# EAGLE board SparkFun-LSM9DS1-Breakout-Panel-v10 (EAGLE 6.6.0), part 1 of 8
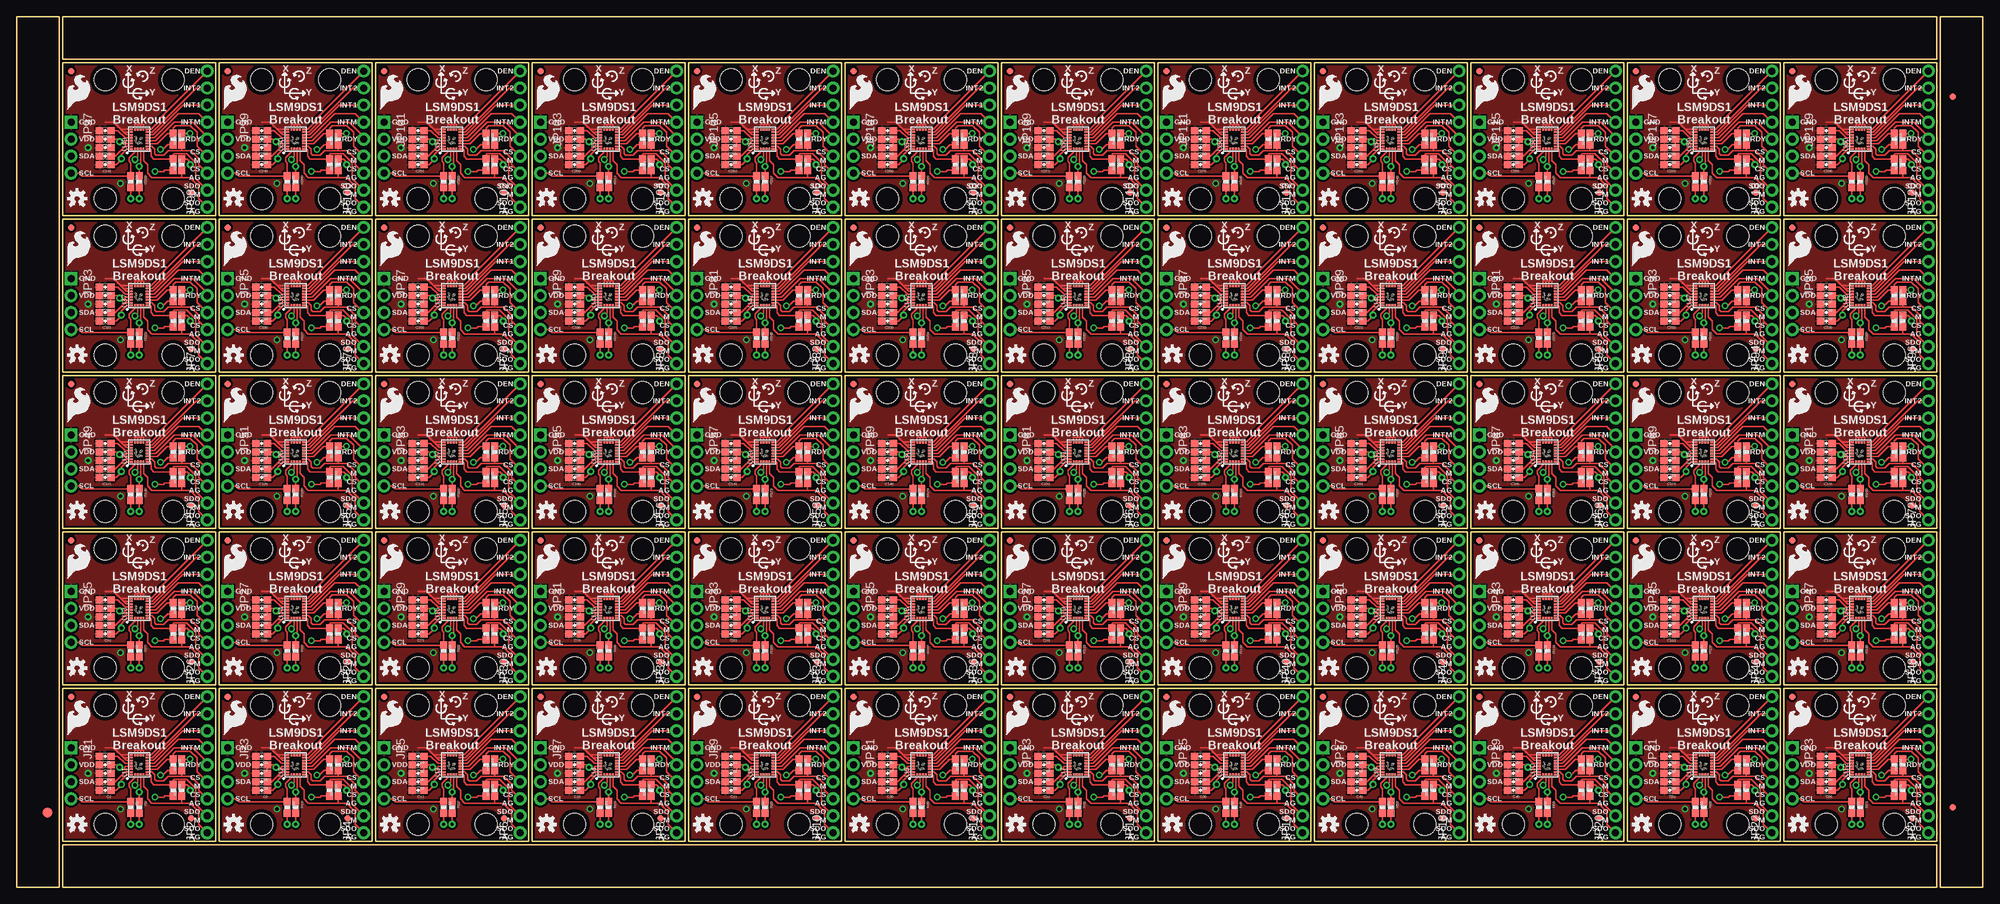
[diagram p0: board, top side]
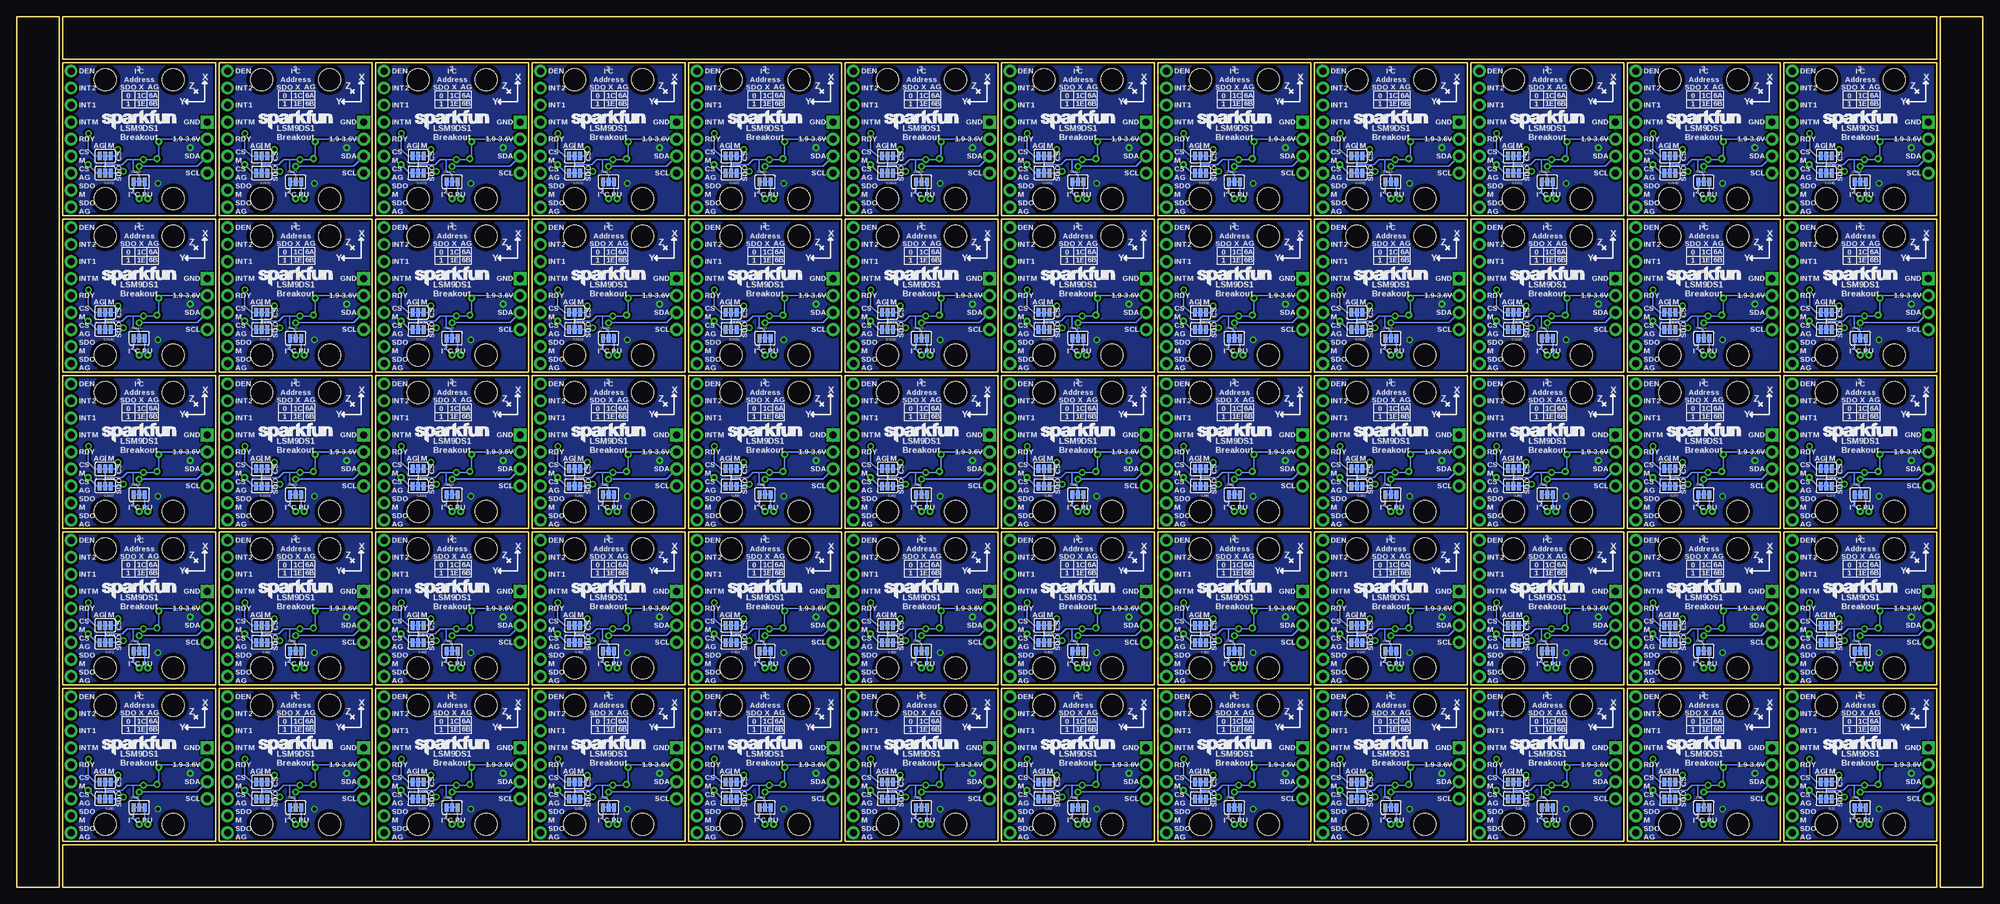
[diagram p1: board, bottom side, seen from below]

Size 293.62 x 130.05 mm. Coordinates in mm from the lower left corner, seen from the top.
Outline: 256 segments
Copper layers (1*16): Top 0.035mm / dielectric 1.5mm / Bottom 0.035mm
Design rules "SparkFun-2-layer *": minimum track width 7mil, minimum drill 15mil, track to track 6mil, track to pad 6mil, pad to pad 6mil, via to via 6mil, smd to smd 6mil, copper to edge 8mil, drill to drill 8mil, minimum pad ring 12mil, minimum via ring 10mil, stop-mask expansion 4mil, vias tented up to drill 20mil, thermal gap 10mil

## Footprints (pad centres in the part's own frame; a part is rotated, then mirrored left to right if it is on the bottom)
0603-CAP = smd 1.1 x 1: 1 -0.85,0; 2 0.85,0
FIDUCIAL-1.5X3 = smd 1.5 x 1.5: 1 0,0
FIDUCIAL-1X2 = smd 1 x 1: 1 0,0
1X04_NO_SILK = drill 1.016 pad 1.88 square: 1 0,0 | drill 1.016 pad 1.88: 2 2.54,0; 3 5.08,0; 4 7.62,0
1X09_NO_SILK = drill 1.016 pad 1.88: 1 0,0; 2 2.54,0; 3 5.08,0; 4 7.62,0; 5 10.16,0; 6 12.7,0; 7 15.24,0; 8 17.78,0; 9 20.32,0
0603-RES = smd 1.1 x 1: 1 -0.85,0; 2 0.85,0
PAD-JUMPER-3-3OF3_NC_BY_TRACE_YES_SILK_FULL_BOX = smd 0.635 x 1.27: 1 -0.813,0; 2 0,0; 3 0.813,0
STAND-OFF = hole 3.302: 0,0
LGA24-8X4 = smd 0.27 x 0.45: 1 -1.505,1.225; 6 -1.505,-1.225; 7 -1.075,-1.225; 8 -0.645,-1.225; 9 -0.215,-1.225; 10 0.215,-1.225; 11 0.645,-1.225; 12 1.075,-1.225; 13 1.505,-1.225; 18 1.505,1.225; 19 1.075,1.225; 20 0.645,1.225; 21 0.215,1.225; 22 -0.215,1.225; 23 -0.645,1.225; 24 -1.075,1.225 | smd 0.45 x 0.27: 2 -1.475,0.645; 3 -1.475,0.215; 4 -1.475,-0.215; 5 -1.475,-0.645; 14 1.475,-0.645; 15 1.475,-0.215; 16 1.475,0.215; 17 1.475,0.645

## Placement (x,y rotation side)
C1  0.1uF  [0603-CAP]  13.21,15.75 180 top
C2  0.1uF  [0603-CAP]  13.21,14.48 180 top
C3  0.1uF  [0603-CAP]  13.21,18.29 180 top
C4  10uF  [0603-CAP]  13.21,17.02 180 top
C5  10nF  [0603-CAP]  13.21,19.56 180 top
C6  0.1uF  [0603-CAP]  36.58,14.48 180 top
C7  0.1uF  [0603-CAP]  36.58,18.29 180 top
C8  0.1uF  [0603-CAP]  36.58,15.75 180 top
C9  10nF  [0603-CAP]  36.58,19.56 180 top
C10  10uF  [0603-CAP]  36.58,17.02 180 top
C11  0.1uF  [0603-CAP]  59.94,14.48 180 top
C12  0.1uF  [0603-CAP]  59.94,18.29 180 top
C13  0.1uF  [0603-CAP]  59.94,15.75 180 top
C14  10nF  [0603-CAP]  59.94,19.56 180 top
C15  10uF  [0603-CAP]  59.94,17.02 180 top
C16  0.1uF  [0603-CAP]  83.31,14.48 180 top
C17  0.1uF  [0603-CAP]  83.31,18.29 180 top
C18  0.1uF  [0603-CAP]  83.31,15.75 180 top
C19  10nF  [0603-CAP]  83.31,19.56 180 top
C20  10uF  [0603-CAP]  83.31,17.02 180 top
C21  0.1uF  [0603-CAP]  106.68,14.48 180 top
C22  0.1uF  [0603-CAP]  106.68,18.29 180 top
C23  0.1uF  [0603-CAP]  106.68,15.75 180 top
C24  10nF  [0603-CAP]  106.68,19.56 180 top
C25  10uF  [0603-CAP]  106.68,17.02 180 top
C26  0.1uF  [0603-CAP]  130.05,14.48 180 top
C27  0.1uF  [0603-CAP]  130.05,18.29 180 top
C28  0.1uF  [0603-CAP]  130.05,15.75 180 top
C29  10nF  [0603-CAP]  130.05,19.56 180 top
C30  10uF  [0603-CAP]  130.05,17.02 180 top
C31  0.1uF  [0603-CAP]  153.42,14.48 180 top
C32  0.1uF  [0603-CAP]  153.42,18.29 180 top
C33  0.1uF  [0603-CAP]  153.42,15.75 180 top
C34  10nF  [0603-CAP]  153.42,19.56 180 top
C35  10uF  [0603-CAP]  153.42,17.02 180 top
C36  0.1uF  [0603-CAP]  176.78,14.48 180 top
C37  0.1uF  [0603-CAP]  176.78,18.29 180 top
C38  0.1uF  [0603-CAP]  176.78,15.75 180 top
C39  10nF  [0603-CAP]  176.78,19.56 180 top
C40  10uF  [0603-CAP]  176.78,17.02 180 top
C41  0.1uF  [0603-CAP]  200.15,14.48 180 top
C42  0.1uF  [0603-CAP]  200.15,18.29 180 top
C43  0.1uF  [0603-CAP]  200.15,15.75 180 top
C44  10nF  [0603-CAP]  200.15,19.56 180 top
C45  10uF  [0603-CAP]  200.15,17.02 180 top
C46  0.1uF  [0603-CAP]  223.52,14.48 180 top
C47  0.1uF  [0603-CAP]  223.52,18.29 180 top
C48  0.1uF  [0603-CAP]  223.52,15.75 180 top
C49  10nF  [0603-CAP]  223.52,19.56 180 top
C50  10uF  [0603-CAP]  223.52,17.02 180 top
C51  0.1uF  [0603-CAP]  246.89,14.48 180 top
C52  0.1uF  [0603-CAP]  246.89,18.29 180 top
C53  0.1uF  [0603-CAP]  246.89,15.75 180 top
C54  10nF  [0603-CAP]  246.89,19.56 180 top
C55  10uF  [0603-CAP]  246.89,17.02 180 top
C56  0.1uF  [0603-CAP]  270.26,14.48 180 top
C57  0.1uF  [0603-CAP]  270.26,18.29 180 top
C58  0.1uF  [0603-CAP]  270.26,15.75 180 top
C59  10nF  [0603-CAP]  270.26,19.56 180 top
C60  10uF  [0603-CAP]  270.26,17.02 180 top
C61  0.1uF  [0603-CAP]  13.21,37.85 180 top
C62  0.1uF  [0603-CAP]  13.21,41.66 180 top
C63  0.1uF  [0603-CAP]  13.21,39.12 180 top
C64  10nF  [0603-CAP]  13.21,42.93 180 top
C65  10uF  [0603-CAP]  13.21,40.39 180 top
C66  0.1uF  [0603-CAP]  36.58,37.85 180 top
C67  0.1uF  [0603-CAP]  36.58,41.66 180 top
C68  0.1uF  [0603-CAP]  36.58,39.12 180 top
C69  10nF  [0603-CAP]  36.58,42.93 180 top
C70  10uF  [0603-CAP]  36.58,40.39 180 top
C71  0.1uF  [0603-CAP]  59.94,37.85 180 top
C72  0.1uF  [0603-CAP]  59.94,41.66 180 top
C73  0.1uF  [0603-CAP]  59.94,39.12 180 top
C74  10nF  [0603-CAP]  59.94,42.93 180 top
C75  10uF  [0603-CAP]  59.94,40.39 180 top
C76  0.1uF  [0603-CAP]  83.31,37.85 180 top
C77  0.1uF  [0603-CAP]  83.31,41.66 180 top
C78  0.1uF  [0603-CAP]  83.31,39.12 180 top
C79  10nF  [0603-CAP]  83.31,42.93 180 top
C80  10uF  [0603-CAP]  83.31,40.39 180 top
C81  0.1uF  [0603-CAP]  106.68,37.85 180 top
C82  0.1uF  [0603-CAP]  106.68,41.66 180 top
C83  0.1uF  [0603-CAP]  106.68,39.12 180 top
C84  10nF  [0603-CAP]  106.68,42.93 180 top
C85  10uF  [0603-CAP]  106.68,40.39 180 top
C86  0.1uF  [0603-CAP]  130.05,37.85 180 top
C87  0.1uF  [0603-CAP]  130.05,41.66 180 top
C88  0.1uF  [0603-CAP]  130.05,39.12 180 top
C89  10nF  [0603-CAP]  130.05,42.93 180 top
C90  10uF  [0603-CAP]  130.05,40.39 180 top
C91  0.1uF  [0603-CAP]  153.42,37.85 180 top
C92  0.1uF  [0603-CAP]  153.42,41.66 180 top
C93  0.1uF  [0603-CAP]  153.42,39.12 180 top
C94  10nF  [0603-CAP]  153.42,42.93 180 top
C95  10uF  [0603-CAP]  153.42,40.39 180 top
C96  0.1uF  [0603-CAP]  176.78,37.85 180 top
C97  0.1uF  [0603-CAP]  176.78,41.66 180 top
C98  0.1uF  [0603-CAP]  176.78,39.12 180 top
C99  10nF  [0603-CAP]  176.78,42.93 180 top
C100  10uF  [0603-CAP]  176.78,40.39 180 top
C101  0.1uF  [0603-CAP]  200.15,37.85 180 top
C102  0.1uF  [0603-CAP]  200.15,41.66 180 top
C103  0.1uF  [0603-CAP]  200.15,39.12 180 top
C104  10nF  [0603-CAP]  200.15,42.93 180 top
C105  10uF  [0603-CAP]  200.15,40.39 180 top
C106  0.1uF  [0603-CAP]  223.52,37.85 180 top
C107  0.1uF  [0603-CAP]  223.52,41.66 180 top
C108  0.1uF  [0603-CAP]  223.52,39.12 180 top
C109  10nF  [0603-CAP]  223.52,42.93 180 top
C110  10uF  [0603-CAP]  223.52,40.39 180 top
C111  0.1uF  [0603-CAP]  246.89,37.85 180 top
C112  0.1uF  [0603-CAP]  246.89,41.66 180 top
C113  0.1uF  [0603-CAP]  246.89,39.12 180 top
C114  10nF  [0603-CAP]  246.89,42.93 180 top
C115  10uF  [0603-CAP]  246.89,40.39 180 top
C116  0.1uF  [0603-CAP]  270.26,37.85 180 top
C117  0.1uF  [0603-CAP]  270.26,41.66 180 top
C118  0.1uF  [0603-CAP]  270.26,39.12 180 top
C119  10nF  [0603-CAP]  270.26,42.93 180 top
C120  10uF  [0603-CAP]  270.26,40.39 180 top
C121  0.1uF  [0603-CAP]  13.21,61.21 180 top
C122  0.1uF  [0603-CAP]  13.21,65.02 180 top
C123  0.1uF  [0603-CAP]  13.21,62.48 180 top
C124  10nF  [0603-CAP]  13.21,66.29 180 top
C125  10uF  [0603-CAP]  13.21,63.75 180 top
C126  0.1uF  [0603-CAP]  36.58,61.21 180 top
C127  0.1uF  [0603-CAP]  36.58,65.02 180 top
C128  0.1uF  [0603-CAP]  36.58,62.48 180 top
C129  10nF  [0603-CAP]  36.58,66.29 180 top
C130  10uF  [0603-CAP]  36.58,63.75 180 top
C131  0.1uF  [0603-CAP]  59.94,61.21 180 top
C132  0.1uF  [0603-CAP]  59.94,65.02 180 top
C133  0.1uF  [0603-CAP]  59.94,62.48 180 top
C134  10nF  [0603-CAP]  59.94,66.29 180 top
C135  10uF  [0603-CAP]  59.94,63.75 180 top
C136  0.1uF  [0603-CAP]  83.31,61.21 180 top
C137  0.1uF  [0603-CAP]  83.31,65.02 180 top
C138  0.1uF  [0603-CAP]  83.31,62.48 180 top
C139  10nF  [0603-CAP]  83.31,66.29 180 top
C140  10uF  [0603-CAP]  83.31,63.75 180 top
C141  0.1uF  [0603-CAP]  106.68,61.21 180 top
C142  0.1uF  [0603-CAP]  106.68,65.02 180 top
C143  0.1uF  [0603-CAP]  106.68,62.48 180 top
C144  10nF  [0603-CAP]  106.68,66.29 180 top
C145  10uF  [0603-CAP]  106.68,63.75 180 top
C146  0.1uF  [0603-CAP]  130.05,61.21 180 top
C147  0.1uF  [0603-CAP]  130.05,65.02 180 top
C148  0.1uF  [0603-CAP]  130.05,62.48 180 top
C149  10nF  [0603-CAP]  130.05,66.29 180 top
C150  10uF  [0603-CAP]  130.05,63.75 180 top
C151  0.1uF  [0603-CAP]  153.42,61.21 180 top
C152  0.1uF  [0603-CAP]  153.42,65.02 180 top
C153  0.1uF  [0603-CAP]  153.42,62.48 180 top
C154  10nF  [0603-CAP]  153.42,66.29 180 top
C155  10uF  [0603-CAP]  153.42,63.75 180 top
C156  0.1uF  [0603-CAP]  176.78,61.21 180 top
C157  0.1uF  [0603-CAP]  176.78,65.02 180 top
C158  0.1uF  [0603-CAP]  176.78,62.48 180 top
C159  10nF  [0603-CAP]  176.78,66.29 180 top
C160  10uF  [0603-CAP]  176.78,63.75 180 top
C161  0.1uF  [0603-CAP]  200.15,61.21 180 top
C162  0.1uF  [0603-CAP]  200.15,65.02 180 top
C163  0.1uF  [0603-CAP]  200.15,62.48 180 top
C164  10nF  [0603-CAP]  200.15,66.29 180 top
C165  10uF  [0603-CAP]  200.15,63.75 180 top
C166  0.1uF  [0603-CAP]  223.52,61.21 180 top
C167  0.1uF  [0603-CAP]  223.52,65.02 180 top
C168  0.1uF  [0603-CAP]  223.52,62.48 180 top
C169  10nF  [0603-CAP]  223.52,66.29 180 top
C170  10uF  [0603-CAP]  223.52,63.75 180 top
C171  0.1uF  [0603-CAP]  246.89,61.21 180 top
C172  0.1uF  [0603-CAP]  246.89,65.02 180 top
C173  0.1uF  [0603-CAP]  246.89,62.48 180 top
C174  10nF  [0603-CAP]  246.89,66.29 180 top
C175  10uF  [0603-CAP]  246.89,63.75 180 top
C176  0.1uF  [0603-CAP]  270.26,61.21 180 top
C177  0.1uF  [0603-CAP]  270.26,65.02 180 top
C178  0.1uF  [0603-CAP]  270.26,62.48 180 top
C179  10nF  [0603-CAP]  270.26,66.29 180 top
C180  10uF  [0603-CAP]  270.26,63.75 180 top
C181  0.1uF  [0603-CAP]  13.21,84.58 180 top
C182  0.1uF  [0603-CAP]  13.21,88.39 180 top
C183  0.1uF  [0603-CAP]  13.21,85.85 180 top
C184  10nF  [0603-CAP]  13.21,89.66 180 top
C185  10uF  [0603-CAP]  13.21,87.12 180 top
C186  0.1uF  [0603-CAP]  36.58,84.58 180 top
C187  0.1uF  [0603-CAP]  36.58,88.39 180 top
C188  0.1uF  [0603-CAP]  36.58,85.85 180 top
C189  10nF  [0603-CAP]  36.58,89.66 180 top
C190  10uF  [0603-CAP]  36.58,87.12 180 top
C191  0.1uF  [0603-CAP]  59.94,84.58 180 top
C192  0.1uF  [0603-CAP]  59.94,88.39 180 top
C193  0.1uF  [0603-CAP]  59.94,85.85 180 top
C194  10nF  [0603-CAP]  59.94,89.66 180 top
C195  10uF  [0603-CAP]  59.94,87.12 180 top
C196  0.1uF  [0603-CAP]  83.31,84.58 180 top
C197  0.1uF  [0603-CAP]  83.31,88.39 180 top
C198  0.1uF  [0603-CAP]  83.31,85.85 180 top
C199  10nF  [0603-CAP]  83.31,89.66 180 top
C200  10uF  [0603-CAP]  83.31,87.12 180 top
C201  0.1uF  [0603-CAP]  106.68,84.58 180 top
C202  0.1uF  [0603-CAP]  106.68,88.39 180 top
C203  0.1uF  [0603-CAP]  106.68,85.85 180 top
C204  10nF  [0603-CAP]  106.68,89.66 180 top
C205  10uF  [0603-CAP]  106.68,87.12 180 top
C206  0.1uF  [0603-CAP]  130.05,84.58 180 top
C207  0.1uF  [0603-CAP]  130.05,88.39 180 top
C208  0.1uF  [0603-CAP]  130.05,85.85 180 top
C209  10nF  [0603-CAP]  130.05,89.66 180 top
C210  10uF  [0603-CAP]  130.05,87.12 180 top
C211  0.1uF  [0603-CAP]  153.42,84.58 180 top
C212  0.1uF  [0603-CAP]  153.42,88.39 180 top
C213  0.1uF  [0603-CAP]  153.42,85.85 180 top
C214  10nF  [0603-CAP]  153.42,89.66 180 top
C215  10uF  [0603-CAP]  153.42,87.12 180 top
C216  0.1uF  [0603-CAP]  176.78,84.58 180 top
C217  0.1uF  [0603-CAP]  176.78,88.39 180 top
C218  0.1uF  [0603-CAP]  176.78,85.85 180 top
C219  10nF  [0603-CAP]  176.78,89.66 180 top
C220  10uF  [0603-CAP]  176.78,87.12 180 top
C221  0.1uF  [0603-CAP]  200.15,84.58 180 top
C222  0.1uF  [0603-CAP]  200.15,88.39 180 top
C223  0.1uF  [0603-CAP]  200.15,85.85 180 top
C224  10nF  [0603-CAP]  200.15,89.66 180 top
C225  10uF  [0603-CAP]  200.15,87.12 180 top
C226  0.1uF  [0603-CAP]  223.52,84.58 180 top
C227  0.1uF  [0603-CAP]  223.52,88.39 180 top
C228  0.1uF  [0603-CAP]  223.52,85.85 180 top
C229  10nF  [0603-CAP]  223.52,89.66 180 top
C230  10uF  [0603-CAP]  223.52,87.12 180 top
C231  0.1uF  [0603-CAP]  246.89,84.58 180 top
C232  0.1uF  [0603-CAP]  246.89,88.39 180 top
C233  0.1uF  [0603-CAP]  246.89,85.85 180 top
C234  10nF  [0603-CAP]  246.89,89.66 180 top
C235  10uF  [0603-CAP]  246.89,87.12 180 top
C236  0.1uF  [0603-CAP]  270.26,84.58 180 top
C237  0.1uF  [0603-CAP]  270.26,88.39 180 top
C238  0.1uF  [0603-CAP]  270.26,85.85 180 top
C239  10nF  [0603-CAP]  270.26,89.66 180 top
C240  10uF  [0603-CAP]  270.26,87.12 180 top
C241  0.1uF  [0603-CAP]  13.21,107.95 180 top
C242  0.1uF  [0603-CAP]  13.21,111.76 180 top
C243  0.1uF  [0603-CAP]  13.21,109.22 180 top
C244  10nF  [0603-CAP]  13.21,113.03 180 top
C245  10uF  [0603-CAP]  13.21,110.49 180 top
C246  0.1uF  [0603-CAP]  36.58,107.95 180 top
C247  0.1uF  [0603-CAP]  36.58,111.76 180 top
C248  0.1uF  [0603-CAP]  36.58,109.22 180 top
C249  10nF  [0603-CAP]  36.58,113.03 180 top
C250  10uF  [0603-CAP]  36.58,110.49 180 top
C251  0.1uF  [0603-CAP]  59.94,107.95 180 top
C252  0.1uF  [0603-CAP]  59.94,111.76 180 top
C253  0.1uF  [0603-CAP]  59.94,109.22 180 top
C254  10nF  [0603-CAP]  59.94,113.03 180 top
C255  10uF  [0603-CAP]  59.94,110.49 180 top
C256  0.1uF  [0603-CAP]  83.31,107.95 180 top
C257  0.1uF  [0603-CAP]  83.31,111.76 180 top
C258  0.1uF  [0603-CAP]  83.31,109.22 180 top
C259  10nF  [0603-CAP]  83.31,113.03 180 top
C260  10uF  [0603-CAP]  83.31,110.49 180 top
C261  0.1uF  [0603-CAP]  106.68,107.95 180 top
C262  0.1uF  [0603-CAP]  106.68,111.76 180 top
C263  0.1uF  [0603-CAP]  106.68,109.22 180 top
C264  10nF  [0603-CAP]  106.68,113.03 180 top
C265  10uF  [0603-CAP]  106.68,110.49 180 top
C266  0.1uF  [0603-CAP]  130.05,107.95 180 top
C267  0.1uF  [0603-CAP]  130.05,111.76 180 top
C268  0.1uF  [0603-CAP]  130.05,109.22 180 top
C269  10nF  [0603-CAP]  130.05,113.03 180 top
C270  10uF  [0603-CAP]  130.05,110.49 180 top
C271  0.1uF  [0603-CAP]  153.42,107.95 180 top
C272  0.1uF  [0603-CAP]  153.42,111.76 180 top
C273  0.1uF  [0603-CAP]  153.42,109.22 180 top
C274  10nF  [0603-CAP]  153.42,113.03 180 top
C275  10uF  [0603-CAP]  153.42,110.49 180 top
C276  0.1uF  [0603-CAP]  176.78,107.95 180 top
C277  0.1uF  [0603-CAP]  176.78,111.76 180 top
C278  0.1uF  [0603-CAP]  176.78,109.22 180 top
C279  10nF  [0603-CAP]  176.78,113.03 180 top
C280  10uF  [0603-CAP]  176.78,110.49 180 top
C281  0.1uF  [0603-CAP]  200.15,107.95 180 top
C282  0.1uF  [0603-CAP]  200.15,111.76 180 top
C283  0.1uF  [0603-CAP]  200.15,109.22 180 top
C284  10nF  [0603-CAP]  200.15,113.03 180 top
C285  10uF  [0603-CAP]  200.15,110.49 180 top
C286  0.1uF  [0603-CAP]  223.52,107.95 180 top
C287  0.1uF  [0603-CAP]  223.52,111.76 180 top
C288  0.1uF  [0603-CAP]  223.52,109.22 180 top
C289  10nF  [0603-CAP]  223.52,113.03 180 top
C290  10uF  [0603-CAP]  223.52,110.49 180 top
C291  0.1uF  [0603-CAP]  246.89,107.95 180 top
C292  0.1uF  [0603-CAP]  246.89,111.76 180 top
C293  0.1uF  [0603-CAP]  246.89,109.22 180 top
C294  10nF  [0603-CAP]  246.89,113.03 180 top
C295  10uF  [0603-CAP]  246.89,110.49 180 top
C296  0.1uF  [0603-CAP]  270.26,107.95 180 top
C297  0.1uF  [0603-CAP]  270.26,111.76 180 top
C298  0.1uF  [0603-CAP]  270.26,109.22 180 top
C299  10nF  [0603-CAP]  270.26,113.03 180 top
C300  10uF  [0603-CAP]  270.26,110.49 180 top
E$1  [FIDUCIAL-1.5X3]  4.57,11.18 0 top
E$4  [FIDUCIAL-1X2]  289.18,11.94 0 top
E$5  [FIDUCIAL-1X2]  289.18,118.11 180 top
FID1  FIDUCIAL1X2  [FIDUCIAL-1X2]  26.04,10.29 270 top
FID2  FIDUCIAL1X2  [FIDUCIAL-1X2]  8.13,28.45 270 top
FID3  FIDUCIAL1X2  [FIDUCIAL-1X2]  49.4,10.29 270 top
FID4  FIDUCIAL1X2  [FIDUCIAL-1X2]  31.5,28.45 270 top
FID5  FIDUCIAL1X2  [FIDUCIAL-1X2]  72.77,10.29 270 top
FID6  FIDUCIAL1X2  [FIDUCIAL-1X2]  54.86,28.45 270 top
FID7  FIDUCIAL1X2  [FIDUCIAL-1X2]  96.14,10.29 270 top
FID8  FIDUCIAL1X2  [FIDUCIAL-1X2]  78.23,28.45 270 top
FID9  FIDUCIAL1X2  [FIDUCIAL-1X2]  119.51,10.29 270 top
FID10  FIDUCIAL1X2  [FIDUCIAL-1X2]  101.6,28.45 270 top
FID11  FIDUCIAL1X2  [FIDUCIAL-1X2]  142.88,10.29 270 top
FID12  FIDUCIAL1X2  [FIDUCIAL-1X2]  124.97,28.45 270 top
FID13  FIDUCIAL1X2  [FIDUCIAL-1X2]  166.24,10.29 270 top
FID14  FIDUCIAL1X2  [FIDUCIAL-1X2]  148.34,28.45 270 top
FID15  FIDUCIAL1X2  [FIDUCIAL-1X2]  189.61,10.29 270 top
FID16  FIDUCIAL1X2  [FIDUCIAL-1X2]  171.7,28.45 270 top
FID17  FIDUCIAL1X2  [FIDUCIAL-1X2]  212.98,10.29 270 top
FID18  FIDUCIAL1X2  [FIDUCIAL-1X2]  195.07,28.45 270 top
FID19  FIDUCIAL1X2  [FIDUCIAL-1X2]  236.35,10.29 270 top
FID20  FIDUCIAL1X2  [FIDUCIAL-1X2]  218.44,28.45 270 top
FID21  FIDUCIAL1X2  [FIDUCIAL-1X2]  259.71,10.29 270 top
FID22  FIDUCIAL1X2  [FIDUCIAL-1X2]  241.81,28.45 270 top
FID23  FIDUCIAL1X2  [FIDUCIAL-1X2]  283.08,10.29 270 top
FID24  FIDUCIAL1X2  [FIDUCIAL-1X2]  265.18,28.45 270 top
FID25  FIDUCIAL1X2  [FIDUCIAL-1X2]  26.04,33.66 270 top
FID26  FIDUCIAL1X2  [FIDUCIAL-1X2]  8.13,51.82 270 top
FID27  FIDUCIAL1X2  [FIDUCIAL-1X2]  49.4,33.66 270 top
FID28  FIDUCIAL1X2  [FIDUCIAL-1X2]  31.5,51.82 270 top
FID29  FIDUCIAL1X2  [FIDUCIAL-1X2]  72.77,33.66 270 top
FID30  FIDUCIAL1X2  [FIDUCIAL-1X2]  54.86,51.82 270 top
FID31  FIDUCIAL1X2  [FIDUCIAL-1X2]  96.14,33.66 270 top
FID32  FIDUCIAL1X2  [FIDUCIAL-1X2]  78.23,51.82 270 top
FID33  FIDUCIAL1X2  [FIDUCIAL-1X2]  119.51,33.66 270 top
FID34  FIDUCIAL1X2  [FIDUCIAL-1X2]  101.6,51.82 270 top
FID35  FIDUCIAL1X2  [FIDUCIAL-1X2]  142.88,33.66 270 top
FID36  FIDUCIAL1X2  [FIDUCIAL-1X2]  124.97,51.82 270 top
FID37  FIDUCIAL1X2  [FIDUCIAL-1X2]  166.24,33.66 270 top
FID38  FIDUCIAL1X2  [FIDUCIAL-1X2]  148.34,51.82 270 top
FID39  FIDUCIAL1X2  [FIDUCIAL-1X2]  189.61,33.66 270 top
FID40  FIDUCIAL1X2  [FIDUCIAL-1X2]  171.7,51.82 270 top
FID41  FIDUCIAL1X2  [FIDUCIAL-1X2]  212.98,33.66 270 top
FID42  FIDUCIAL1X2  [FIDUCIAL-1X2]  195.07,51.82 270 top
FID43  FIDUCIAL1X2  [FIDUCIAL-1X2]  236.35,33.66 270 top
FID44  FIDUCIAL1X2  [FIDUCIAL-1X2]  218.44,51.82 270 top
FID45  FIDUCIAL1X2  [FIDUCIAL-1X2]  259.71,33.66 270 top
FID46  FIDUCIAL1X2  [FIDUCIAL-1X2]  241.81,51.82 270 top
FID47  FIDUCIAL1X2  [FIDUCIAL-1X2]  283.08,33.66 270 top
FID48  FIDUCIAL1X2  [FIDUCIAL-1X2]  265.18,51.82 270 top
FID49  FIDUCIAL1X2  [FIDUCIAL-1X2]  26.04,57.02 270 top
FID50  FIDUCIAL1X2  [FIDUCIAL-1X2]  8.13,75.18 270 top
FID51  FIDUCIAL1X2  [FIDUCIAL-1X2]  49.4,57.02 270 top
FID52  FIDUCIAL1X2  [FIDUCIAL-1X2]  31.5,75.18 270 top
FID53  FIDUCIAL1X2  [FIDUCIAL-1X2]  72.77,57.02 270 top
FID54  FIDUCIAL1X2  [FIDUCIAL-1X2]  54.86,75.18 270 top
FID55  FIDUCIAL1X2  [FIDUCIAL-1X2]  96.14,57.02 270 top
FID56  FIDUCIAL1X2  [FIDUCIAL-1X2]  78.23,75.18 270 top
FID57  FIDUCIAL1X2  [FIDUCIAL-1X2]  119.51,57.02 270 top
FID58  FIDUCIAL1X2  [FIDUCIAL-1X2]  101.6,75.18 270 top
FID59  FIDUCIAL1X2  [FIDUCIAL-1X2]  142.88,57.02 270 top
FID60  FIDUCIAL1X2  [FIDUCIAL-1X2]  124.97,75.18 270 top
FID61  FIDUCIAL1X2  [FIDUCIAL-1X2]  166.24,57.02 270 top
FID62  FIDUCIAL1X2  [FIDUCIAL-1X2]  148.34,75.18 270 top
FID63  FIDUCIAL1X2  [FIDUCIAL-1X2]  189.61,57.02 270 top
FID64  FIDUCIAL1X2  [FIDUCIAL-1X2]  171.7,75.18 270 top
FID65  FIDUCIAL1X2  [FIDUCIAL-1X2]  212.98,57.02 270 top
FID66  FIDUCIAL1X2  [FIDUCIAL-1X2]  195.07,75.18 270 top
FID67  FIDUCIAL1X2  [FIDUCIAL-1X2]  236.35,57.02 270 top
FID68  FIDUCIAL1X2  [FIDUCIAL-1X2]  218.44,75.18 270 top
FID69  FIDUCIAL1X2  [FIDUCIAL-1X2]  259.71,57.02 270 top
FID70  FIDUCIAL1X2  [FIDUCIAL-1X2]  241.81,75.18 270 top
FID71  FIDUCIAL1X2  [FIDUCIAL-1X2]  283.08,57.02 270 top
FID72  FIDUCIAL1X2  [FIDUCIAL-1X2]  265.18,75.18 270 top
FID73  FIDUCIAL1X2  [FIDUCIAL-1X2]  26.04,80.39 270 top
FID74  FIDUCIAL1X2  [FIDUCIAL-1X2]  8.13,98.55 270 top
FID75  FIDUCIAL1X2  [FIDUCIAL-1X2]  49.4,80.39 270 top
FID76  FIDUCIAL1X2  [FIDUCIAL-1X2]  31.5,98.55 270 top
FID77  FIDUCIAL1X2  [FIDUCIAL-1X2]  72.77,80.39 270 top
FID78  FIDUCIAL1X2  [FIDUCIAL-1X2]  54.86,98.55 270 top
FID79  FIDUCIAL1X2  [FIDUCIAL-1X2]  96.14,80.39 270 top
FID80  FIDUCIAL1X2  [FIDUCIAL-1X2]  78.23,98.55 270 top
FID81  FIDUCIAL1X2  [FIDUCIAL-1X2]  119.51,80.39 270 top
FID82  FIDUCIAL1X2  [FIDUCIAL-1X2]  101.6,98.55 270 top
FID83  FIDUCIAL1X2  [FIDUCIAL-1X2]  142.88,80.39 270 top
FID84  FIDUCIAL1X2  [FIDUCIAL-1X2]  124.97,98.55 270 top
FID85  FIDUCIAL1X2  [FIDUCIAL-1X2]  166.24,80.39 270 top
FID86  FIDUCIAL1X2  [FIDUCIAL-1X2]  148.34,98.55 270 top
FID87  FIDUCIAL1X2  [FIDUCIAL-1X2]  189.61,80.39 270 top
FID88  FIDUCIAL1X2  [FIDUCIAL-1X2]  171.7,98.55 270 top
FID89  FIDUCIAL1X2  [FIDUCIAL-1X2]  212.98,80.39 270 top
FID90  FIDUCIAL1X2  [FIDUCIAL-1X2]  195.07,98.55 270 top
FID91  FIDUCIAL1X2  [FIDUCIAL-1X2]  236.35,80.39 270 top
FID92  FIDUCIAL1X2  [FIDUCIAL-1X2]  218.44,98.55 270 top
FID93  FIDUCIAL1X2  [FIDUCIAL-1X2]  259.71,80.39 270 top
FID94  FIDUCIAL1X2  [FIDUCIAL-1X2]  241.81,98.55 270 top
FID95  FIDUCIAL1X2  [FIDUCIAL-1X2]  283.08,80.39 270 top
FID96  FIDUCIAL1X2  [FIDUCIAL-1X2]  265.18,98.55 270 top
FID97  FIDUCIAL1X2  [FIDUCIAL-1X2]  26.04,103.76 270 top
FID98  FIDUCIAL1X2  [FIDUCIAL-1X2]  8.13,121.92 270 top
FID99  FIDUCIAL1X2  [FIDUCIAL-1X2]  49.4,103.76 270 top
FID100  FIDUCIAL1X2  [FIDUCIAL-1X2]  31.5,121.92 270 top
FID101  FIDUCIAL1X2  [FIDUCIAL-1X2]  72.77,103.76 270 top
FID102  FIDUCIAL1X2  [FIDUCIAL-1X2]  54.86,121.92 270 top
FID103  FIDUCIAL1X2  [FIDUCIAL-1X2]  96.14,103.76 270 top
FID104  FIDUCIAL1X2  [FIDUCIAL-1X2]  78.23,121.92 270 top
FID105  FIDUCIAL1X2  [FIDUCIAL-1X2]  119.51,103.76 270 top
FID106  FIDUCIAL1X2  [FIDUCIAL-1X2]  101.6,121.92 270 top
FID107  FIDUCIAL1X2  [FIDUCIAL-1X2]  142.88,103.76 270 top
FID108  FIDUCIAL1X2  [FIDUCIAL-1X2]  124.97,121.92 270 top
FID109  FIDUCIAL1X2  [FIDUCIAL-1X2]  166.24,103.76 270 top
FID110  FIDUCIAL1X2  [FIDUCIAL-1X2]  148.34,121.92 270 top
FID111  FIDUCIAL1X2  [FIDUCIAL-1X2]  189.61,103.76 270 top
FID112  FIDUCIAL1X2  [FIDUCIAL-1X2]  171.7,121.92 270 top
FID113  FIDUCIAL1X2  [FIDUCIAL-1X2]  212.98,103.76 270 top
FID114  FIDUCIAL1X2  [FIDUCIAL-1X2]  195.07,121.92 270 top
FID115  FIDUCIAL1X2  [FIDUCIAL-1X2]  236.35,103.76 270 top
FID116  FIDUCIAL1X2  [FIDUCIAL-1X2]  218.44,121.92 270 top
FID117  FIDUCIAL1X2  [FIDUCIAL-1X2]  259.71,103.76 270 top
FID118  FIDUCIAL1X2  [FIDUCIAL-1X2]  241.81,121.92 270 top
FID119  FIDUCIAL1X2  [FIDUCIAL-1X2]  283.08,103.76 270 top
FID120  FIDUCIAL1X2  [FIDUCIAL-1X2]  265.18,121.92 270 top
JP1  [1X04_NO_SILK]  8.13,20.83 270 top
JP2  M09NO_SILK  [1X09_NO_SILK]  28.45,8.13 90 top
JP3  [1X04_NO_SILK]  31.5,20.83 270 top
JP4  M09NO_SILK  [1X09_NO_SILK]  51.82,8.13 90 top
JP5  [1X04_NO_SILK]  54.86,20.83 270 top
JP6  M09NO_SILK  [1X09_NO_SILK]  75.18,8.13 90 top
JP7  [1X04_NO_SILK]  78.23,20.83 270 top
JP8  M09NO_SILK  [1X09_NO_SILK]  98.55,8.13 90 top
JP9  [1X04_NO_SILK]  101.6,20.83 270 top
JP10  M09NO_SILK  [1X09_NO_SILK]  121.92,8.13 90 top
JP11  [1X04_NO_SILK]  124.97,20.83 270 top
JP12  M09NO_SILK  [1X09_NO_SILK]  145.29,8.13 90 top
JP13  [1X04_NO_SILK]  148.34,20.83 270 top
JP14  M09NO_SILK  [1X09_NO_SILK]  168.66,8.13 90 top
JP15  [1X04_NO_SILK]  171.7,20.83 270 top
JP16  M09NO_SILK  [1X09_NO_SILK]  192.02,8.13 90 top
JP17  [1X04_NO_SILK]  195.07,20.83 270 top
JP18  M09NO_SILK  [1X09_NO_SILK]  215.39,8.13 90 top
JP19  [1X04_NO_SILK]  218.44,20.83 270 top
JP20  M09NO_SILK  [1X09_NO_SILK]  238.76,8.13 90 top
JP21  [1X04_NO_SILK]  241.81,20.83 270 top
JP22  M09NO_SILK  [1X09_NO_SILK]  262.13,8.13 90 top
JP23  [1X04_NO_SILK]  265.18,20.83 270 top
JP24  M09NO_SILK  [1X09_NO_SILK]  285.5,8.13 90 top
JP25  [1X04_NO_SILK]  8.13,44.2 270 top
JP26  M09NO_SILK  [1X09_NO_SILK]  28.45,31.5 90 top
JP27  [1X04_NO_SILK]  31.5,44.2 270 top
JP28  M09NO_SILK  [1X09_NO_SILK]  51.82,31.5 90 top
JP29  [1X04_NO_SILK]  54.86,44.2 270 top
JP30  M09NO_SILK  [1X09_NO_SILK]  75.18,31.5 90 top
JP31  [1X04_NO_SILK]  78.23,44.2 270 top
JP32  M09NO_SILK  [1X09_NO_SILK]  98.55,31.5 90 top
JP33  [1X04_NO_SILK]  101.6,44.2 270 top
JP34  M09NO_SILK  [1X09_NO_SILK]  121.92,31.5 90 top
JP35  [1X04_NO_SILK]  124.97,44.2 270 top
JP36  M09NO_SILK  [1X09_NO_SILK]  145.29,31.5 90 top
JP37  [1X04_NO_SILK]  148.34,44.2 270 top
JP38  M09NO_SILK  [1X09_NO_SILK]  168.66,31.5 90 top
JP39  [1X04_NO_SILK]  171.7,44.2 270 top
JP40  M09NO_SILK  [1X09_NO_SILK]  192.02,31.5 90 top
JP41  [1X04_NO_SILK]  195.07,44.2 270 top
JP42  M09NO_SILK  [1X09_NO_SILK]  215.39,31.5 90 top
JP43  [1X04_NO_SILK]  218.44,44.2 270 top
JP44  M09NO_SILK  [1X09_NO_SILK]  238.76,31.5 90 top
JP45  [1X04_NO_SILK]  241.81,44.2 270 top
JP46  M09NO_SILK  [1X09_NO_SILK]  262.13,31.5 90 top
JP47  [1X04_NO_SILK]  265.18,44.2 270 top
JP48  M09NO_SILK  [1X09_NO_SILK]  285.5,31.5 90 top
JP49  [1X04_NO_SILK]  8.13,67.56 270 top
JP50  M09NO_SILK  [1X09_NO_SILK]  28.45,54.86 90 top
JP51  [1X04_NO_SILK]  31.5,67.56 270 top
JP52  M09NO_SILK  [1X09_NO_SILK]  51.82,54.86 90 top
JP53  [1X04_NO_SILK]  54.86,67.56 270 top
JP54  M09NO_SILK  [1X09_NO_SILK]  75.18,54.86 90 top
JP55  [1X04_NO_SILK]  78.23,67.56 270 top
JP56  M09NO_SILK  [1X09_NO_SILK]  98.55,54.86 90 top
JP57  [1X04_NO_SILK]  101.6,67.56 270 top
JP58  M09NO_SILK  [1X09_NO_SILK]  121.92,54.86 90 top
JP59  [1X04_NO_SILK]  124.97,67.56 270 top
JP60  M09NO_SILK  [1X09_NO_SILK]  145.29,54.86 90 top
JP61  [1X04_NO_SILK]  148.34,67.56 270 top
JP62  M09NO_SILK  [1X09_NO_SILK]  168.66,54.86 90 top
JP63  [1X04_NO_SILK]  171.7,67.56 270 top
JP64  M09NO_SILK  [1X09_NO_SILK]  192.02,54.86 90 top
JP65  [1X04_NO_SILK]  195.07,67.56 270 top
JP66  M09NO_SILK  [1X09_NO_SILK]  215.39,54.86 90 top
JP67  [1X04_NO_SILK]  218.44,67.56 270 top
JP68  M09NO_SILK  [1X09_NO_SILK]  238.76,54.86 90 top
JP69  [1X04_NO_SILK]  241.81,67.56 270 top
JP70  M09NO_SILK  [1X09_NO_SILK]  262.13,54.86 90 top
JP71  [1X04_NO_SILK]  265.18,67.56 270 top
JP72  M09NO_SILK  [1X09_NO_SILK]  285.5,54.86 90 top
JP73  [1X04_NO_SILK]  8.13,90.93 270 top
JP74  M09NO_SILK  [1X09_NO_SILK]  28.45,78.23 90 top
JP75  [1X04_NO_SILK]  31.5,90.93 270 top
JP76  M09NO_SILK  [1X09_NO_SILK]  51.82,78.23 90 top
JP77  [1X04_NO_SILK]  54.86,90.93 270 top
JP78  M09NO_SILK  [1X09_NO_SILK]  75.18,78.23 90 top
JP79  [1X04_NO_SILK]  78.23,90.93 270 top
JP80  M09NO_SILK  [1X09_NO_SILK]  98.55,78.23 90 top
JP81  [1X04_NO_SILK]  101.6,90.93 270 top
JP82  M09NO_SILK  [1X09_NO_SILK]  121.92,78.23 90 top
JP83  [1X04_NO_SILK]  124.97,90.93 270 top
JP84  M09NO_SILK  [1X09_NO_SILK]  145.29,78.23 90 top
JP85  [1X04_NO_SILK]  148.34,90.93 270 top
JP86  M09NO_SILK  [1X09_NO_SILK]  168.66,78.23 90 top
JP87  [1X04_NO_SILK]  171.7,90.93 270 top
JP88  M09NO_SILK  [1X09_NO_SILK]  192.02,78.23 90 top
JP89  [1X04_NO_SILK]  195.07,90.93 270 top
JP90  M09NO_SILK  [1X09_NO_SILK]  215.39,78.23 90 top
JP91  [1X04_NO_SILK]  218.44,90.93 270 top
JP92  M09NO_SILK  [1X09_NO_SILK]  238.76,78.23 90 top
JP93  [1X04_NO_SILK]  241.81,90.93 270 top
JP94  M09NO_SILK  [1X09_NO_SILK]  262.13,78.23 90 top
JP95  [1X04_NO_SILK]  265.18,90.93 270 top
JP96  M09NO_SILK  [1X09_NO_SILK]  285.5,78.23 90 top
JP97  [1X04_NO_SILK]  8.13,114.3 270 top
JP98  M09NO_SILK  [1X09_NO_SILK]  28.45,101.6 90 top
JP99  [1X04_NO_SILK]  31.5,114.3 270 top
JP100  M09NO_SILK  [1X09_NO_SILK]  51.82,101.6 90 top
JP101  [1X04_NO_SILK]  54.86,114.3 270 top
JP102  M09NO_SILK  [1X09_NO_SILK]  75.18,101.6 90 top
JP103  [1X04_NO_SILK]  78.23,114.3 270 top
JP104  M09NO_SILK  [1X09_NO_SILK]  98.55,101.6 90 top
JP105  [1X04_NO_SILK]  101.6,114.3 270 top
JP106  M09NO_SILK  [1X09_NO_SILK]  121.92,101.6 90 top
JP107  [1X04_NO_SILK]  124.97,114.3 270 top
JP108  M09NO_SILK  [1X09_NO_SILK]  145.29,101.6 90 top
JP109  [1X04_NO_SILK]  148.34,114.3 270 top
JP110  M09NO_SILK  [1X09_NO_SILK]  168.66,101.6 90 top
JP111  [1X04_NO_SILK]  171.7,114.3 270 top
JP112  M09NO_SILK  [1X09_NO_SILK]  192.02,101.6 90 top
JP113  [1X04_NO_SILK]  195.07,114.3 270 top
JP114  M09NO_SILK  [1X09_NO_SILK]  215.39,101.6 90 top
JP115  [1X04_NO_SILK]  218.44,114.3 270 top
JP116  M09NO_SILK  [1X09_NO_SILK]  238.76,101.6 90 top
JP117  [1X04_NO_SILK]  241.81,114.3 270 top
JP118  M09NO_SILK  [1X09_NO_SILK]  262.13,101.6 90 top
JP119  [1X04_NO_SILK]  265.18,114.3 270 top
JP120  M09NO_SILK  [1X09_NO_SILK]  285.5,101.6 90 top
LOGO1  SFE_LOGO_NAME.1_INCH  [SFE_LOGO_NAME_.1]  24.26,19.3 0 bottom
LOGO2  SFE_LOGO_FLAME.2_INCH  [SFE_LOGO_FLAME_.2]  7.24,22.48 0 top
LOGO3  OSHW-LOGOS  [OSHW-LOGO-S]  9.02,9.4 0 top
LOGO4  SFE_LOGO_NAME.1_INCH  [SFE_LOGO_NAME_.1]  47.62,19.3 0 bottom
LOGO5  SFE_LOGO_FLAME.2_INCH  [SFE_LOGO_FLAME_.2]  30.61,22.48 0 top
LOGO6  OSHW-LOGOS  [OSHW-LOGO-S]  32.38,9.4 0 top
LOGO7  SFE_LOGO_NAME.1_INCH  [SFE_LOGO_NAME_.1]  70.99,19.3 0 bottom
LOGO8  SFE_LOGO_FLAME.2_INCH  [SFE_LOGO_FLAME_.2]  53.98,22.48 0 top
LOGO9  OSHW-LOGOS  [OSHW-LOGO-S]  55.75,9.4 0 top
LOGO10  SFE_LOGO_NAME.1_INCH  [SFE_LOGO_NAME_.1]  94.36,19.3 0 bottom
LOGO11  SFE_LOGO_FLAME.2_INCH  [SFE_LOGO_FLAME_.2]  77.34,22.48 0 top
LOGO12  OSHW-LOGOS  [OSHW-LOGO-S]  79.12,9.4 0 top
LOGO13  SFE_LOGO_NAME.1_INCH  [SFE_LOGO_NAME_.1]  117.73,19.3 0 bottom
LOGO14  SFE_LOGO_FLAME.2_INCH  [SFE_LOGO_FLAME_.2]  100.71,22.48 0 top
LOGO15  OSHW-LOGOS  [OSHW-LOGO-S]  102.49,9.4 0 top
LOGO16  SFE_LOGO_NAME.1_INCH  [SFE_LOGO_NAME_.1]  141.1,19.3 0 bottom
LOGO17  SFE_LOGO_FLAME.2_INCH  [SFE_LOGO_FLAME_.2]  124.08,22.48 0 top
LOGO18  OSHW-LOGOS  [OSHW-LOGO-S]  125.86,9.4 0 top
LOGO19  SFE_LOGO_NAME.1_INCH  [SFE_LOGO_NAME_.1]  164.47,19.3 0 bottom
LOGO20  SFE_LOGO_FLAME.2_INCH  [SFE_LOGO_FLAME_.2]  147.45,22.48 0 top
LOGO21  OSHW-LOGOS  [OSHW-LOGO-S]  149.22,9.4 0 top
LOGO22  SFE_LOGO_NAME.1_INCH  [SFE_LOGO_NAME_.1]  187.83,19.3 0 bottom
LOGO23  SFE_LOGO_FLAME.2_INCH  [SFE_LOGO_FLAME_.2]  170.81,22.48 0 top
LOGO24  OSHW-LOGOS  [OSHW-LOGO-S]  172.59,9.4 0 top
LOGO25  SFE_LOGO_NAME.1_INCH  [SFE_LOGO_NAME_.1]  211.2,19.3 0 bottom
LOGO26  SFE_LOGO_FLAME.2_INCH  [SFE_LOGO_FLAME_.2]  194.18,22.48 0 top
LOGO27  OSHW-LOGOS  [OSHW-LOGO-S]  195.96,9.4 0 top
LOGO28  SFE_LOGO_NAME.1_INCH  [SFE_LOGO_NAME_.1]  234.57,19.3 0 bottom
LOGO29  SFE_LOGO_FLAME.2_INCH  [SFE_LOGO_FLAME_.2]  217.55,22.48 0 top
LOGO30  OSHW-LOGOS  [OSHW-LOGO-S]  219.33,9.4 0 top
LOGO31  SFE_LOGO_NAME.1_INCH  [SFE_LOGO_NAME_.1]  257.94,19.3 0 bottom
LOGO32  SFE_LOGO_FLAME.2_INCH  [SFE_LOGO_FLAME_.2]  240.92,22.48 0 top
LOGO33  OSHW-LOGOS  [OSHW-LOGO-S]  242.7,9.4 0 top
LOGO34  SFE_LOGO_NAME.1_INCH  [SFE_LOGO_NAME_.1]  281.31,19.3 0 bottom
LOGO35  SFE_LOGO_FLAME.2_INCH  [SFE_LOGO_FLAME_.2]  264.29,22.48 0 top
LOGO36  OSHW-LOGOS  [OSHW-LOGO-S]  266.06,9.4 0 top
LOGO37  SFE_LOGO_NAME.1_INCH  [SFE_LOGO_NAME_.1]  24.26,42.67 0 bottom
LOGO38  SFE_LOGO_FLAME.2_INCH  [SFE_LOGO_FLAME_.2]  7.24,45.85 0 top
LOGO39  OSHW-LOGOS  [OSHW-LOGO-S]  9.02,32.77 0 top
LOGO40  SFE_LOGO_NAME.1_INCH  [SFE_LOGO_NAME_.1]  47.62,42.67 0 bottom
LOGO41  SFE_LOGO_FLAME.2_INCH  [SFE_LOGO_FLAME_.2]  30.61,45.85 0 top
LOGO42  OSHW-LOGOS  [OSHW-LOGO-S]  32.38,32.77 0 top
LOGO43  SFE_LOGO_NAME.1_INCH  [SFE_LOGO_NAME_.1]  70.99,42.67 0 bottom
LOGO44  SFE_LOGO_FLAME.2_INCH  [SFE_LOGO_FLAME_.2]  53.98,45.85 0 top
LOGO45  OSHW-LOGOS  [OSHW-LOGO-S]  55.75,32.77 0 top
LOGO46  SFE_LOGO_NAME.1_INCH  [SFE_LOGO_NAME_.1]  94.36,42.67 0 bottom
LOGO47  SFE_LOGO_FLAME.2_INCH  [SFE_LOGO_FLAME_.2]  77.34,45.85 0 top
LOGO48  OSHW-LOGOS  [OSHW-LOGO-S]  79.12,32.77 0 top
LOGO49  SFE_LOGO_NAME.1_INCH  [SFE_LOGO_NAME_.1]  117.73,42.67 0 bottom
LOGO50  SFE_LOGO_FLAME.2_INCH  [SFE_LOGO_FLAME_.2]  100.71,45.85 0 top
LOGO51  OSHW-LOGOS  [OSHW-LOGO-S]  102.49,32.77 0 top
LOGO52  SFE_LOGO_NAME.1_INCH  [SFE_LOGO_NAME_.1]  141.1,42.67 0 bottom
LOGO53  SFE_LOGO_FLAME.2_INCH  [SFE_LOGO_FLAME_.2]  124.08,45.85 0 top
LOGO54  OSHW-LOGOS  [OSHW-LOGO-S]  125.86,32.77 0 top
LOGO55  SFE_LOGO_NAME.1_INCH  [SFE_LOGO_NAME_.1]  164.47,42.67 0 bottom
LOGO56  SFE_LOGO_FLAME.2_INCH  [SFE_LOGO_FLAME_.2]  147.45,45.85 0 top
LOGO57  OSHW-LOGOS  [OSHW-LOGO-S]  149.22,32.77 0 top
LOGO58  SFE_LOGO_NAME.1_INCH  [SFE_LOGO_NAME_.1]  187.83,42.67 0 bottom
LOGO59  SFE_LOGO_FLAME.2_INCH  [SFE_LOGO_FLAME_.2]  170.81,45.85 0 top
LOGO60  OSHW-LOGOS  [OSHW-LOGO-S]  172.59,32.77 0 top
LOGO61  SFE_LOGO_NAME.1_INCH  [SFE_LOGO_NAME_.1]  211.2,42.67 0 bottom
LOGO62  SFE_LOGO_FLAME.2_INCH  [SFE_LOGO_FLAME_.2]  194.18,45.85 0 top
LOGO63  OSHW-LOGOS  [OSHW-LOGO-S]  195.96,32.77 0 top
LOGO64  SFE_LOGO_NAME.1_INCH  [SFE_LOGO_NAME_.1]  234.57,42.67 0 bottom
LOGO65  SFE_LOGO_FLAME.2_INCH  [SFE_LOGO_FLAME_.2]  217.55,45.85 0 top
LOGO66  OSHW-LOGOS  [OSHW-LOGO-S]  219.33,32.77 0 top
LOGO67  SFE_LOGO_NAME.1_INCH  [SFE_LOGO_NAME_.1]  257.94,42.67 0 bottom
LOGO68  SFE_LOGO_FLAME.2_INCH  [SFE_LOGO_FLAME_.2]  240.92,45.85 0 top
LOGO69  OSHW-LOGOS  [OSHW-LOGO-S]  242.7,32.77 0 top
LOGO70  SFE_LOGO_NAME.1_INCH  [SFE_LOGO_NAME_.1]  281.31,42.67 0 bottom
LOGO71  SFE_LOGO_FLAME.2_INCH  [SFE_LOGO_FLAME_.2]  264.29,45.85 0 top
LOGO72  OSHW-LOGOS  [OSHW-LOGO-S]  266.06,32.77 0 top
LOGO73  SFE_LOGO_NAME.1_INCH  [SFE_LOGO_NAME_.1]  24.26,66.04 0 bottom
LOGO74  SFE_LOGO_FLAME.2_INCH  [SFE_LOGO_FLAME_.2]  7.24,69.22 0 top
LOGO75  OSHW-LOGOS  [OSHW-LOGO-S]  9.02,56.13 0 top
LOGO76  SFE_LOGO_NAME.1_INCH  [SFE_LOGO_NAME_.1]  47.62,66.04 0 bottom
LOGO77  SFE_LOGO_FLAME.2_INCH  [SFE_LOGO_FLAME_.2]  30.61,69.22 0 top
LOGO78  OSHW-LOGOS  [OSHW-LOGO-S]  32.38,56.13 0 top
LOGO79  SFE_LOGO_NAME.1_INCH  [SFE_LOGO_NAME_.1]  70.99,66.04 0 bottom
LOGO80  SFE_LOGO_FLAME.2_INCH  [SFE_LOGO_FLAME_.2]  53.98,69.22 0 top
LOGO81  OSHW-LOGOS  [OSHW-LOGO-S]  55.75,56.13 0 top
LOGO82  SFE_LOGO_NAME.1_INCH  [SFE_LOGO_NAME_.1]  94.36,66.04 0 bottom
LOGO83  SFE_LOGO_FLAME.2_INCH  [SFE_LOGO_FLAME_.2]  77.34,69.22 0 top
LOGO84  OSHW-LOGOS  [OSHW-LOGO-S]  79.12,56.13 0 top
LOGO85  SFE_LOGO_NAME.1_INCH  [SFE_LOGO_NAME_.1]  117.73,66.04 0 bottom
LOGO86  SFE_LOGO_FLAME.2_INCH  [SFE_LOGO_FLAME_.2]  100.71,69.22 0 top
LOGO87  OSHW-LOGOS  [OSHW-LOGO-S]  102.49,56.13 0 top
LOGO88  SFE_LOGO_NAME.1_INCH  [SFE_LOGO_NAME_.1]  141.1,66.04 0 bottom
LOGO89  SFE_LOGO_FLAME.2_INCH  [SFE_LOGO_FLAME_.2]  124.08,69.22 0 top
LOGO90  OSHW-LOGOS  [OSHW-LOGO-S]  125.86,56.13 0 top
LOGO91  SFE_LOGO_NAME.1_INCH  [SFE_LOGO_NAME_.1]  164.47,66.04 0 bottom
LOGO92  SFE_LOGO_FLAME.2_INCH  [SFE_LOGO_FLAME_.2]  147.45,69.22 0 top
LOGO93  OSHW-LOGOS  [OSHW-LOGO-S]  149.22,56.13 0 top
LOGO94  SFE_LOGO_NAME.1_INCH  [SFE_LOGO_NAME_.1]  187.83,66.04 0 bottom
LOGO95  SFE_LOGO_FLAME.2_INCH  [SFE_LOGO_FLAME_.2]  170.81,69.22 0 top
LOGO96  OSHW-LOGOS  [OSHW-LOGO-S]  172.59,56.13 0 top
LOGO97  SFE_LOGO_NAME.1_INCH  [SFE_LOGO_NAME_.1]  211.2,66.04 0 bottom
LOGO98  SFE_LOGO_FLAME.2_INCH  [SFE_LOGO_FLAME_.2]  194.18,69.22 0 top
LOGO99  OSHW-LOGOS  [OSHW-LOGO-S]  195.96,56.13 0 top
LOGO100  SFE_LOGO_NAME.1_INCH  [SFE_LOGO_NAME_.1]  234.57,66.04 0 bottom
LOGO101  SFE_LOGO_FLAME.2_INCH  [SFE_LOGO_FLAME_.2]  217.55,69.22 0 top
LOGO102  OSHW-LOGOS  [OSHW-LOGO-S]  219.33,56.13 0 top
LOGO103  SFE_LOGO_NAME.1_INCH  [SFE_LOGO_NAME_.1]  257.94,66.04 0 bottom
LOGO104  SFE_LOGO_FLAME.2_INCH  [SFE_LOGO_FLAME_.2]  240.92,69.22 0 top
LOGO105  OSHW-LOGOS  [OSHW-LOGO-S]  242.7,56.13 0 top
LOGO106  SFE_LOGO_NAME.1_INCH  [SFE_LOGO_NAME_.1]  281.31,66.04 0 bottom
LOGO107  SFE_LOGO_FLAME.2_INCH  [SFE_LOGO_FLAME_.2]  264.29,69.22 0 top
LOGO108  OSHW-LOGOS  [OSHW-LOGO-S]  266.06,56.13 0 top
LOGO109  SFE_LOGO_NAME.1_INCH  [SFE_LOGO_NAME_.1]  24.26,89.41 0 bottom
LOGO110  SFE_LOGO_FLAME.2_INCH  [SFE_LOGO_FLAME_.2]  7.24,92.58 0 top
LOGO111  OSHW-LOGOS  [OSHW-LOGO-S]  9.02,79.5 0 top
LOGO112  SFE_LOGO_NAME.1_INCH  [SFE_LOGO_NAME_.1]  47.62,89.41 0 bottom
LOGO113  SFE_LOGO_FLAME.2_INCH  [SFE_LOGO_FLAME_.2]  30.61,92.58 0 top
LOGO114  OSHW-LOGOS  [OSHW-LOGO-S]  32.38,79.5 0 top
LOGO115  SFE_LOGO_NAME.1_INCH  [SFE_LOGO_NAME_.1]  70.99,89.41 0 bottom
LOGO116  SFE_LOGO_FLAME.2_INCH  [SFE_LOGO_FLAME_.2]  53.98,92.58 0 top
LOGO117  OSHW-LOGOS  [OSHW-LOGO-S]  55.75,79.5 0 top
LOGO118  SFE_LOGO_NAME.1_INCH  [SFE_LOGO_NAME_.1]  94.36,89.41 0 bottom
LOGO119  SFE_LOGO_FLAME.2_INCH  [SFE_LOGO_FLAME_.2]  77.34,92.58 0 top
LOGO120  OSHW-LOGOS  [OSHW-LOGO-S]  79.12,79.5 0 top
LOGO121  SFE_LOGO_NAME.1_INCH  [SFE_LOGO_NAME_.1]  117.73,89.41 0 bottom
LOGO122  SFE_LOGO_FLAME.2_INCH  [SFE_LOGO_FLAME_.2]  100.71,92.58 0 top
LOGO123  OSHW-LOGOS  [OSHW-LOGO-S]  102.49,79.5 0 top
LOGO124  SFE_LOGO_NAME.1_INCH  [SFE_LOGO_NAME_.1]  141.1,89.41 0 bottom
LOGO125  SFE_LOGO_FLAME.2_INCH  [SFE_LOGO_FLAME_.2]  124.08,92.58 0 top
LOGO126  OSHW-LOGOS  [OSHW-LOGO-S]  125.86,79.5 0 top
LOGO127  SFE_LOGO_NAME.1_INCH  [SFE_LOGO_NAME_.1]  164.47,89.41 0 bottom
LOGO128  SFE_LOGO_FLAME.2_INCH  [SFE_LOGO_FLAME_.2]  147.45,92.58 0 top
LOGO129  OSHW-LOGOS  [OSHW-LOGO-S]  149.22,79.5 0 top
LOGO130  SFE_LOGO_NAME.1_INCH  [SFE_LOGO_NAME_.1]  187.83,89.41 0 bottom
LOGO131  SFE_LOGO_FLAME.2_INCH  [SFE_LOGO_FLAME_.2]  170.81,92.58 0 top
LOGO132  OSHW-LOGOS  [OSHW-LOGO-S]  172.59,79.5 0 top
LOGO133  SFE_LOGO_NAME.1_INCH  [SFE_LOGO_NAME_.1]  211.2,89.41 0 bottom
LOGO134  SFE_LOGO_FLAME.2_INCH  [SFE_LOGO_FLAME_.2]  194.18,92.58 0 top
LOGO135  OSHW-LOGOS  [OSHW-LOGO-S]  195.96,79.5 0 top
LOGO136  SFE_LOGO_NAME.1_INCH  [SFE_LOGO_NAME_.1]  234.57,89.41 0 bottom
LOGO137  SFE_LOGO_FLAME.2_INCH  [SFE_LOGO_FLAME_.2]  217.55,92.58 0 top
LOGO138  OSHW-LOGOS  [OSHW-LOGO-S]  219.33,79.5 0 top
LOGO139  SFE_LOGO_NAME.1_INCH  [SFE_LOGO_NAME_.1]  257.94,89.41 0 bottom
LOGO140  SFE_LOGO_FLAME.2_INCH  [SFE_LOGO_FLAME_.2]  240.92,92.58 0 top
LOGO141  OSHW-LOGOS  [OSHW-LOGO-S]  242.7,79.5 0 top
LOGO142  SFE_LOGO_NAME.1_INCH  [SFE_LOGO_NAME_.1]  281.31,89.41 0 bottom
LOGO143  SFE_LOGO_FLAME.2_INCH  [SFE_LOGO_FLAME_.2]  264.29,92.58 0 top
LOGO144  OSHW-LOGOS  [OSHW-LOGO-S]  266.06,79.5 0 top
LOGO145  SFE_LOGO_NAME.1_INCH  [SFE_LOGO_NAME_.1]  24.26,112.78 0 bottom
LOGO146  SFE_LOGO_FLAME.2_INCH  [SFE_LOGO_FLAME_.2]  7.24,115.95 0 top
LOGO147  OSHW-LOGOS  [OSHW-LOGO-S]  9.02,102.87 0 top
LOGO148  SFE_LOGO_NAME.1_INCH  [SFE_LOGO_NAME_.1]  47.62,112.78 0 bottom
LOGO149  SFE_LOGO_FLAME.2_INCH  [SFE_LOGO_FLAME_.2]  30.61,115.95 0 top
LOGO150  OSHW-LOGOS  [OSHW-LOGO-S]  32.38,102.87 0 top
LOGO151  SFE_LOGO_NAME.1_INCH  [SFE_LOGO_NAME_.1]  70.99,112.78 0 bottom
LOGO152  SFE_LOGO_FLAME.2_INCH  [SFE_LOGO_FLAME_.2]  53.98,115.95 0 top
LOGO153  OSHW-LOGOS  [OSHW-LOGO-S]  55.75,102.87 0 top
LOGO154  SFE_LOGO_NAME.1_INCH  [SFE_LOGO_NAME_.1]  94.36,112.78 0 bottom
LOGO155  SFE_LOGO_FLAME.2_INCH  [SFE_LOGO_FLAME_.2]  77.34,115.95 0 top
LOGO156  OSHW-LOGOS  [OSHW-LOGO-S]  79.12,102.87 0 top
LOGO157  SFE_LOGO_NAME.1_INCH  [SFE_LOGO_NAME_.1]  117.73,112.78 0 bottom
LOGO158  SFE_LOGO_FLAME.2_INCH  [SFE_LOGO_FLAME_.2]  100.71,115.95 0 top
LOGO159  OSHW-LOGOS  [OSHW-LOGO-S]  102.49,102.87 0 top
LOGO160  SFE_LOGO_NAME.1_INCH  [SFE_LOGO_NAME_.1]  141.1,112.78 0 bottom
LOGO161  SFE_LOGO_FLAME.2_INCH  [SFE_LOGO_FLAME_.2]  124.08,115.95 0 top
LOGO162  OSHW-LOGOS  [OSHW-LOGO-S]  125.86,102.87 0 top
LOGO163  SFE_LOGO_NAME.1_INCH  [SFE_LOGO_NAME_.1]  164.47,112.78 0 bottom
LOGO164  SFE_LOGO_FLAME.2_INCH  [SFE_LOGO_FLAME_.2]  147.45,115.95 0 top
LOGO165  OSHW-LOGOS  [OSHW-LOGO-S]  149.22,102.87 0 top
LOGO166  SFE_LOGO_NAME.1_INCH  [SFE_LOGO_NAME_.1]  187.83,112.78 0 bottom
LOGO167  SFE_LOGO_FLAME.2_INCH  [SFE_LOGO_FLAME_.2]  170.81,115.95 0 top
LOGO168  OSHW-LOGOS  [OSHW-LOGO-S]  172.59,102.87 0 top
LOGO169  SFE_LOGO_NAME.1_INCH  [SFE_LOGO_NAME_.1]  211.2,112.78 0 bottom
LOGO170  SFE_LOGO_FLAME.2_INCH  [SFE_LOGO_FLAME_.2]  194.18,115.95 0 top
LOGO171  OSHW-LOGOS  [OSHW-LOGO-S]  195.96,102.87 0 top
LOGO172  SFE_LOGO_NAME.1_INCH  [SFE_LOGO_NAME_.1]  234.57,112.78 0 bottom
LOGO173  SFE_LOGO_FLAME.2_INCH  [SFE_LOGO_FLAME_.2]  217.55,115.95 0 top
LOGO174  OSHW-LOGOS  [OSHW-LOGO-S]  219.33,102.87 0 top
LOGO175  SFE_LOGO_NAME.1_INCH  [SFE_LOGO_NAME_.1]  257.94,112.78 0 bottom
LOGO176  SFE_LOGO_FLAME.2_INCH  [SFE_LOGO_FLAME_.2]  240.92,115.95 0 top
LOGO177  OSHW-LOGOS  [OSHW-LOGO-S]  242.7,102.87 0 top
LOGO178  SFE_LOGO_NAME.1_INCH  [SFE_LOGO_NAME_.1]  281.31,112.78 0 bottom
LOGO179  SFE_LOGO_FLAME.2_INCH  [SFE_LOGO_FLAME_.2]  264.29,115.95 0 top
LOGO180  OSHW-LOGOS  [OSHW-LOGO-S]  266.06,102.87 0 top
R1  10K  [0603-RES]  24.64,18.29 90 top
R2  10K  [0603-RES]  23.37,18.29 270 top
R3  10K  [0603-RES]  24.64,14.48 90 top
R4  10K  [0603-RES]  23.37,14.48 270 top
R5  10K  [0603-RES]  18.29,11.94 270 top
R6  10K  [0603-RES]  17.02,11.94 270 top
R7  10K  [0603-RES]  48.01,18.29 90 top
R8  10K  [0603-RES]  46.74,18.29 270 top
R9  10K  [0603-RES]  48.01,14.48 90 top
R10  10K  [0603-RES]  46.74,14.48 270 top
R11  10K  [0603-RES]  41.66,11.94 270 top
R12  10K  [0603-RES]  40.39,11.94 270 top
R13  10K  [0603-RES]  71.37,18.29 90 top
R14  10K  [0603-RES]  70.1,18.29 270 top
R15  10K  [0603-RES]  71.37,14.48 90 top
R16  10K  [0603-RES]  70.1,14.48 270 top
R17  10K  [0603-RES]  65.02,11.94 270 top
R18  10K  [0603-RES]  63.75,11.94 270 top
R19  10K  [0603-RES]  94.74,18.29 90 top
R20  10K  [0603-RES]  93.47,18.29 270 top
R21  10K  [0603-RES]  94.74,14.48 90 top
R22  10K  [0603-RES]  93.47,14.48 270 top
R23  10K  [0603-RES]  88.39,11.94 270 top
R24  10K  [0603-RES]  87.12,11.94 270 top
R25  10K  [0603-RES]  118.11,18.29 90 top
R26  10K  [0603-RES]  116.84,18.29 270 top
R27  10K  [0603-RES]  118.11,14.48 90 top
R28  10K  [0603-RES]  116.84,14.48 270 top
R29  10K  [0603-RES]  111.76,11.94 270 top
R30  10K  [0603-RES]  110.49,11.94 270 top
R31  10K  [0603-RES]  141.48,18.29 90 top
R32  10K  [0603-RES]  140.21,18.29 270 top
R33  10K  [0603-RES]  141.48,14.48 90 top
R34  10K  [0603-RES]  140.21,14.48 270 top
R35  10K  [0603-RES]  135.13,11.94 270 top
R36  10K  [0603-RES]  133.86,11.94 270 top
R37  10K  [0603-RES]  164.85,18.29 90 top
R38  10K  [0603-RES]  163.58,18.29 270 top
R39  10K  [0603-RES]  164.85,14.48 90 top
R40  10K  [0603-RES]  163.58,14.48 270 top
R41  10K  [0603-RES]  158.5,11.94 270 top
R42  10K  [0603-RES]  157.23,11.94 270 top
R43  10K  [0603-RES]  188.21,18.29 90 top
R44  10K  [0603-RES]  186.94,18.29 270 top
R45  10K  [0603-RES]  188.21,14.48 90 top
R46  10K  [0603-RES]  186.94,14.48 270 top
R47  10K  [0603-RES]  181.86,11.94 270 top
R48  10K  [0603-RES]  180.59,11.94 270 top
R49  10K  [0603-RES]  211.58,18.29 90 top
R50  10K  [0603-RES]  210.31,18.29 270 top
R51  10K  [0603-RES]  211.58,14.48 90 top
R52  10K  [0603-RES]  210.31,14.48 270 top
R53  10K  [0603-RES]  205.23,11.94 270 top
R54  10K  [0603-RES]  203.96,11.94 270 top
R55  10K  [0603-RES]  234.95,18.29 90 top
R56  10K  [0603-RES]  233.68,18.29 270 top
R57  10K  [0603-RES]  234.95,14.48 90 top
R58  10K  [0603-RES]  233.68,14.48 270 top
R59  10K  [0603-RES]  228.6,11.94 270 top
R60  10K  [0603-RES]  227.33,11.94 270 top
R61  10K  [0603-RES]  258.32,18.29 90 top
R62  10K  [0603-RES]  257.05,18.29 270 top
R63  10K  [0603-RES]  258.32,14.48 90 top
R64  10K  [0603-RES]  257.05,14.48 270 top
R65  10K  [0603-RES]  251.97,11.94 270 top
R66  10K  [0603-RES]  250.7,11.94 270 top
R67  10K  [0603-RES]  281.69,18.29 90 top
R68  10K  [0603-RES]  280.42,18.29 270 top
R69  10K  [0603-RES]  281.69,14.48 90 top
R70  10K  [0603-RES]  280.42,14.48 270 top
R71  10K  [0603-RES]  275.34,11.94 270 top
R72  10K  [0603-RES]  274.07,11.94 270 top
R73  10K  [0603-RES]  24.64,41.66 90 top
R74  10K  [0603-RES]  23.37,41.66 270 top
R75  10K  [0603-RES]  24.64,37.85 90 top
R76  10K  [0603-RES]  23.37,37.85 270 top
R77  10K  [0603-RES]  18.29,35.31 270 top
R78  10K  [0603-RES]  17.02,35.31 270 top
R79  10K  [0603-RES]  48.01,41.66 90 top
R80  10K  [0603-RES]  46.74,41.66 270 top
R81  10K  [0603-RES]  48.01,37.85 90 top
R82  10K  [0603-RES]  46.74,37.85 270 top
R83  10K  [0603-RES]  41.66,35.31 270 top
R84  10K  [0603-RES]  40.39,35.31 270 top
R85  10K  [0603-RES]  71.37,41.66 90 top
R86  10K  [0603-RES]  70.1,41.66 270 top
R87  10K  [0603-RES]  71.37,37.85 90 top
R88  10K  [0603-RES]  70.1,37.85 270 top
R89  10K  [0603-RES]  65.02,35.31 270 top
R90  10K  [0603-RES]  63.75,35.31 270 top
R91  10K  [0603-RES]  94.74,41.66 90 top
R92  10K  [0603-RES]  93.47,41.66 270 top
R93  10K  [0603-RES]  94.74,37.85 90 top
R94  10K  [0603-RES]  93.47,37.85 270 top
R95  10K  [0603-RES]  88.39,35.31 270 top
R96  10K  [0603-RES]  87.12,35.31 270 top
R97  10K  [0603-RES]  118.11,41.66 90 top
R98  10K  [0603-RES]  116.84,41.66 270 top
R99  10K  [0603-RES]  118.11,37.85 90 top
R100  10K  [0603-RES]  116.84,37.85 270 top
R101  10K  [0603-RES]  111.76,35.31 270 top
R102  10K  [0603-RES]  110.49,35.31 270 top
R103  10K  [0603-RES]  141.48,41.66 90 top
R104  10K  [0603-RES]  140.21,41.66 270 top
R105  10K  [0603-RES]  141.48,37.85 90 top
R106  10K  [0603-RES]  140.21,37.85 270 top
R107  10K  [0603-RES]  135.13,35.31 270 top
R108  10K  [0603-RES]  133.86,35.31 270 top
R109  10K  [0603-RES]  164.85,41.66 90 top
R110  10K  [0603-RES]  163.58,41.66 270 top
R111  10K  [0603-RES]  164.85,37.85 90 top
R112  10K  [0603-RES]  163.58,37.85 270 top
R113  10K  [0603-RES]  158.5,35.31 270 top
R114  10K  [0603-RES]  157.23,35.31 270 top
R115  10K  [0603-RES]  188.21,41.66 90 top
R116  10K  [0603-RES]  186.94,41.66 270 top
R117  10K  [0603-RES]  188.21,37.85 90 top
R118  10K  [0603-RES]  186.94,37.85 270 top
R119  10K  [0603-RES]  181.86,35.31 270 top
R120  10K  [0603-RES]  180.59,35.31 270 top
R121  10K  [0603-RES]  211.58,41.66 90 top
R122  10K  [0603-RES]  210.31,41.66 270 top
R123  10K  [0603-RES]  211.58,37.85 90 top
R124  10K  [0603-RES]  210.31,37.85 270 top
R125  10K  [0603-RES]  205.23,35.31 270 top
R126  10K  [0603-RES]  203.96,35.31 270 top
R127  10K  [0603-RES]  234.95,41.66 90 top
R128  10K  [0603-RES]  233.68,41.66 270 top
R129  10K  [0603-RES]  234.95,37.85 90 top
R130  10K  [0603-RES]  233.68,37.85 270 top
R131  10K  [0603-RES]  228.6,35.31 270 top
R132  10K  [0603-RES]  227.33,35.31 270 top
R133  10K  [0603-RES]  258.32,41.66 90 top
R134  10K  [0603-RES]  257.05,41.66 270 top
R135  10K  [0603-RES]  258.32,37.85 90 top
R136  10K  [0603-RES]  257.05,37.85 270 top
R137  10K  [0603-RES]  251.97,35.31 270 top
R138  10K  [0603-RES]  250.7,35.31 270 top
R139  10K  [0603-RES]  281.69,41.66 90 top
R140  10K  [0603-RES]  280.42,41.66 270 top
R141  10K  [0603-RES]  281.69,37.85 90 top
R142  10K  [0603-RES]  280.42,37.85 270 top
R143  10K  [0603-RES]  275.34,35.31 270 top
R144  10K  [0603-RES]  274.07,35.31 270 top
R145  10K  [0603-RES]  24.64,65.02 90 top
R146  10K  [0603-RES]  23.37,65.02 270 top
R147  10K  [0603-RES]  24.64,61.21 90 top
R148  10K  [0603-RES]  23.37,61.21 270 top
R149  10K  [0603-RES]  18.29,58.67 270 top
R150  10K  [0603-RES]  17.02,58.67 270 top
R151  10K  [0603-RES]  48.01,65.02 90 top
R152  10K  [0603-RES]  46.74,65.02 270 top
R153  10K  [0603-RES]  48.01,61.21 90 top
R154  10K  [0603-RES]  46.74,61.21 270 top
R155  10K  [0603-RES]  41.66,58.67 270 top
R156  10K  [0603-RES]  40.39,58.67 270 top
R157  10K  [0603-RES]  71.37,65.02 90 top
R158  10K  [0603-RES]  70.1,65.02 270 top
R159  10K  [0603-RES]  71.37,61.21 90 top
R160  10K  [0603-RES]  70.1,61.21 270 top
R161  10K  [0603-RES]  65.02,58.67 270 top
R162  10K  [0603-RES]  63.75,58.67 270 top
R163  10K  [0603-RES]  94.74,65.02 90 top
R164  10K  [0603-RES]  93.47,65.02 270 top
R165  10K  [0603-RES]  94.74,61.21 90 top
R166  10K  [0603-RES]  93.47,61.21 270 top
R167  10K  [0603-RES]  88.39,58.67 270 top
R168  10K  [0603-RES]  87.12,58.67 270 top
R169  10K  [0603-RES]  118.11,65.02 90 top
R170  10K  [0603-RES]  116.84,65.02 270 top
R171  10K  [0603-RES]  118.11,61.21 90 top
R172  10K  [0603-RES]  116.84,61.21 270 top
R173  10K  [0603-RES]  111.76,58.67 270 top
R174  10K  [0603-RES]  110.49,58.67 270 top
R175  10K  [0603-RES]  141.48,65.02 90 top
R176  10K  [0603-RES]  140.21,65.02 270 top
R177  10K  [0603-RES]  141.48,61.21 90 top
R178  10K  [0603-RES]  140.21,61.21 270 top
R179  10K  [0603-RES]  135.13,58.67 270 top
R180  10K  [0603-RES]  133.86,58.67 270 top
R181  10K  [0603-RES]  164.85,65.02 90 top
R182  10K  [0603-RES]  163.58,65.02 270 top
R183  10K  [0603-RES]  164.85,61.21 90 top
R184  10K  [0603-RES]  163.58,61.21 270 top
R185  10K  [0603-RES]  158.5,58.67 270 top
R186  10K  [0603-RES]  157.23,58.67 270 top
R187  10K  [0603-RES]  188.21,65.02 90 top
R188  10K  [0603-RES]  186.94,65.02 270 top
R189  10K  [0603-RES]  188.21,61.21 90 top
R190  10K  [0603-RES]  186.94,61.21 270 top
R191  10K  [0603-RES]  181.86,58.67 270 top
R192  10K  [0603-RES]  180.59,58.67 270 top
R193  10K  [0603-RES]  211.58,65.02 90 top
R194  10K  [0603-RES]  210.31,65.02 270 top
R195  10K  [0603-RES]  211.58,61.21 90 top
R196  10K  [0603-RES]  210.31,61.21 270 top
R197  10K  [0603-RES]  205.23,58.67 270 top
R198  10K  [0603-RES]  203.96,58.67 270 top
R199  10K  [0603-RES]  234.95,65.02 90 top
R200  10K  [0603-RES]  233.68,65.02 270 top
R201  10K  [0603-RES]  234.95,61.21 90 top
R202  10K  [0603-RES]  233.68,61.21 270 top
R203  10K  [0603-RES]  228.6,58.67 270 top
R204  10K  [0603-RES]  227.33,58.67 270 top
R205  10K  [0603-RES]  258.32,65.02 90 top
R206  10K  [0603-RES]  257.05,65.02 270 top
R207  10K  [0603-RES]  258.32,61.21 90 top
R208  10K  [0603-RES]  257.05,61.21 270 top
R209  10K  [0603-RES]  251.97,58.67 270 top
R210  10K  [0603-RES]  250.7,58.67 270 top
R211  10K  [0603-RES]  281.69,65.02 90 top
R212  10K  [0603-RES]  280.42,65.02 270 top
R213  10K  [0603-RES]  281.69,61.21 90 top
R214  10K  [0603-RES]  280.42,61.21 270 top
R215  10K  [0603-RES]  275.34,58.67 270 top
R216  10K  [0603-RES]  274.07,58.67 270 top
R217  10K  [0603-RES]  24.64,88.39 90 top
R218  10K  [0603-RES]  23.37,88.39 270 top
R219  10K  [0603-RES]  24.64,84.58 90 top
R220  10K  [0603-RES]  23.37,84.58 270 top
R221  10K  [0603-RES]  18.29,82.04 270 top
R222  10K  [0603-RES]  17.02,82.04 270 top
R223  10K  [0603-RES]  48.01,88.39 90 top
R224  10K  [0603-RES]  46.74,88.39 270 top
R225  10K  [0603-RES]  48.01,84.58 90 top
R226  10K  [0603-RES]  46.74,84.58 270 top
R227  10K  [0603-RES]  41.66,82.04 270 top
R228  10K  [0603-RES]  40.39,82.04 270 top
R229  10K  [0603-RES]  71.37,88.39 90 top
R230  10K  [0603-RES]  70.1,88.39 270 top
R231  10K  [0603-RES]  71.37,84.58 90 top
R232  10K  [0603-RES]  70.1,84.58 270 top
R233  10K  [0603-RES]  65.02,82.04 270 top